# EAGLE board UwU Bot (EAGLE 9.6.2)
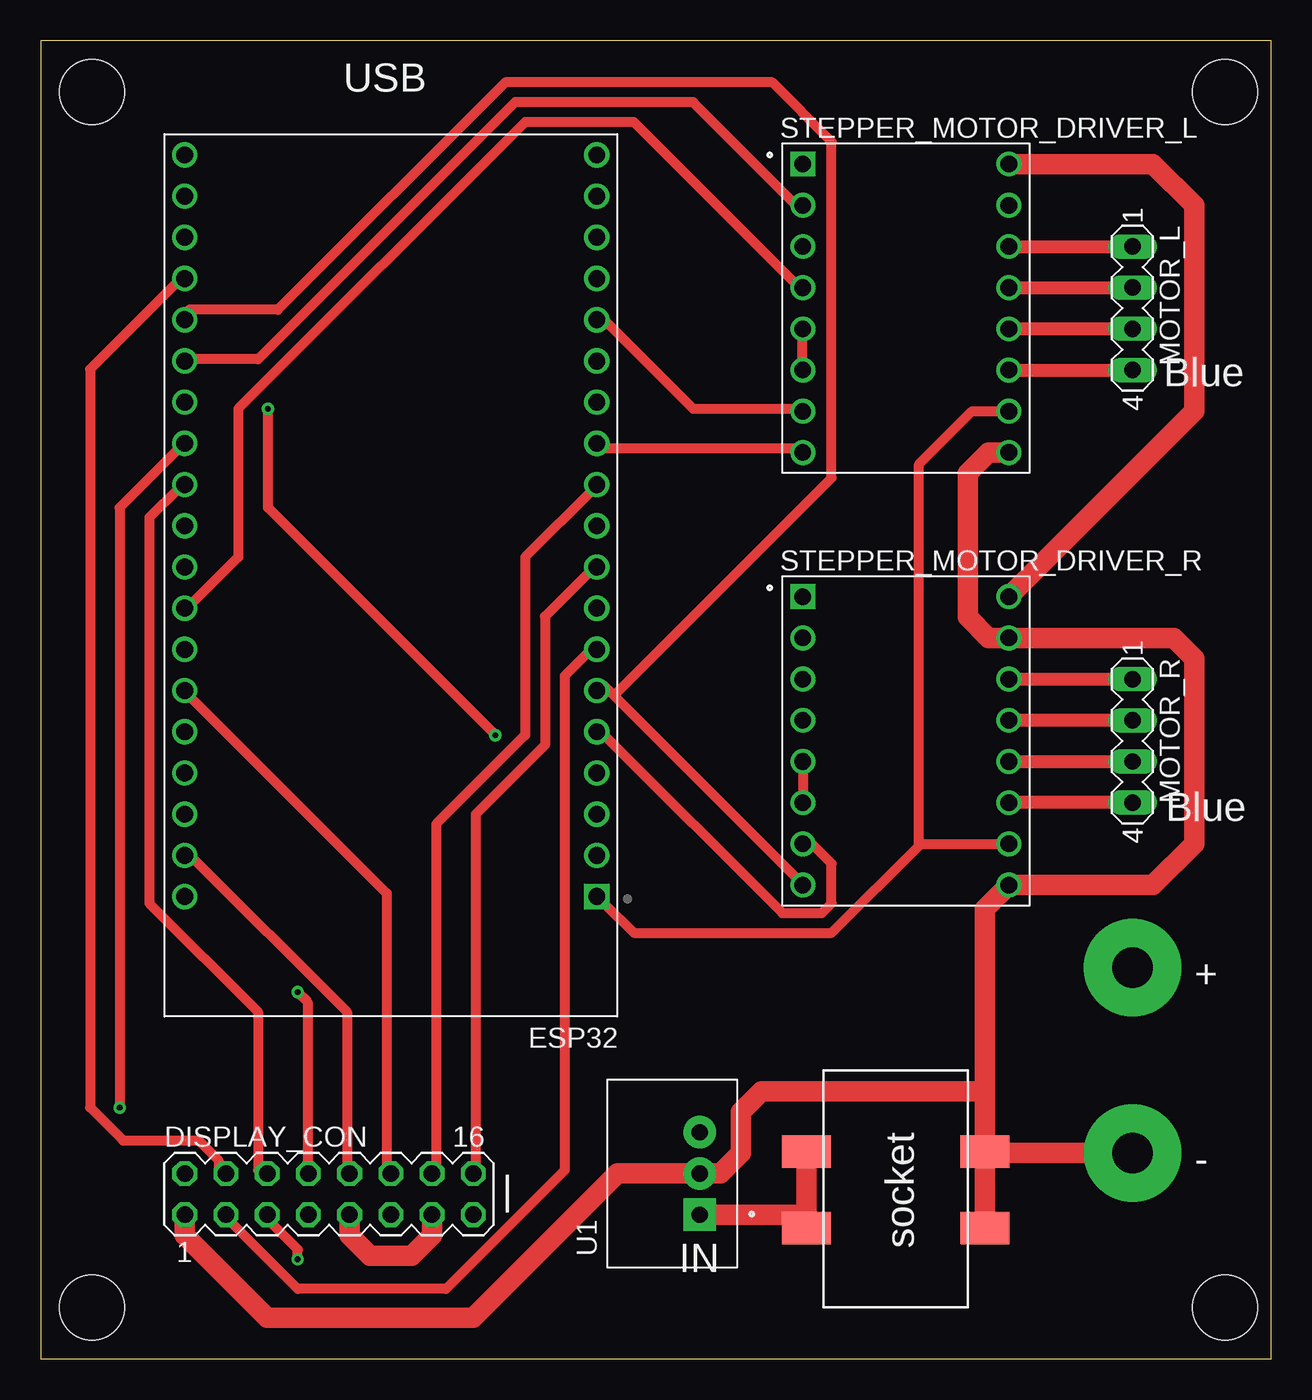
[diagram p0: board, top side]
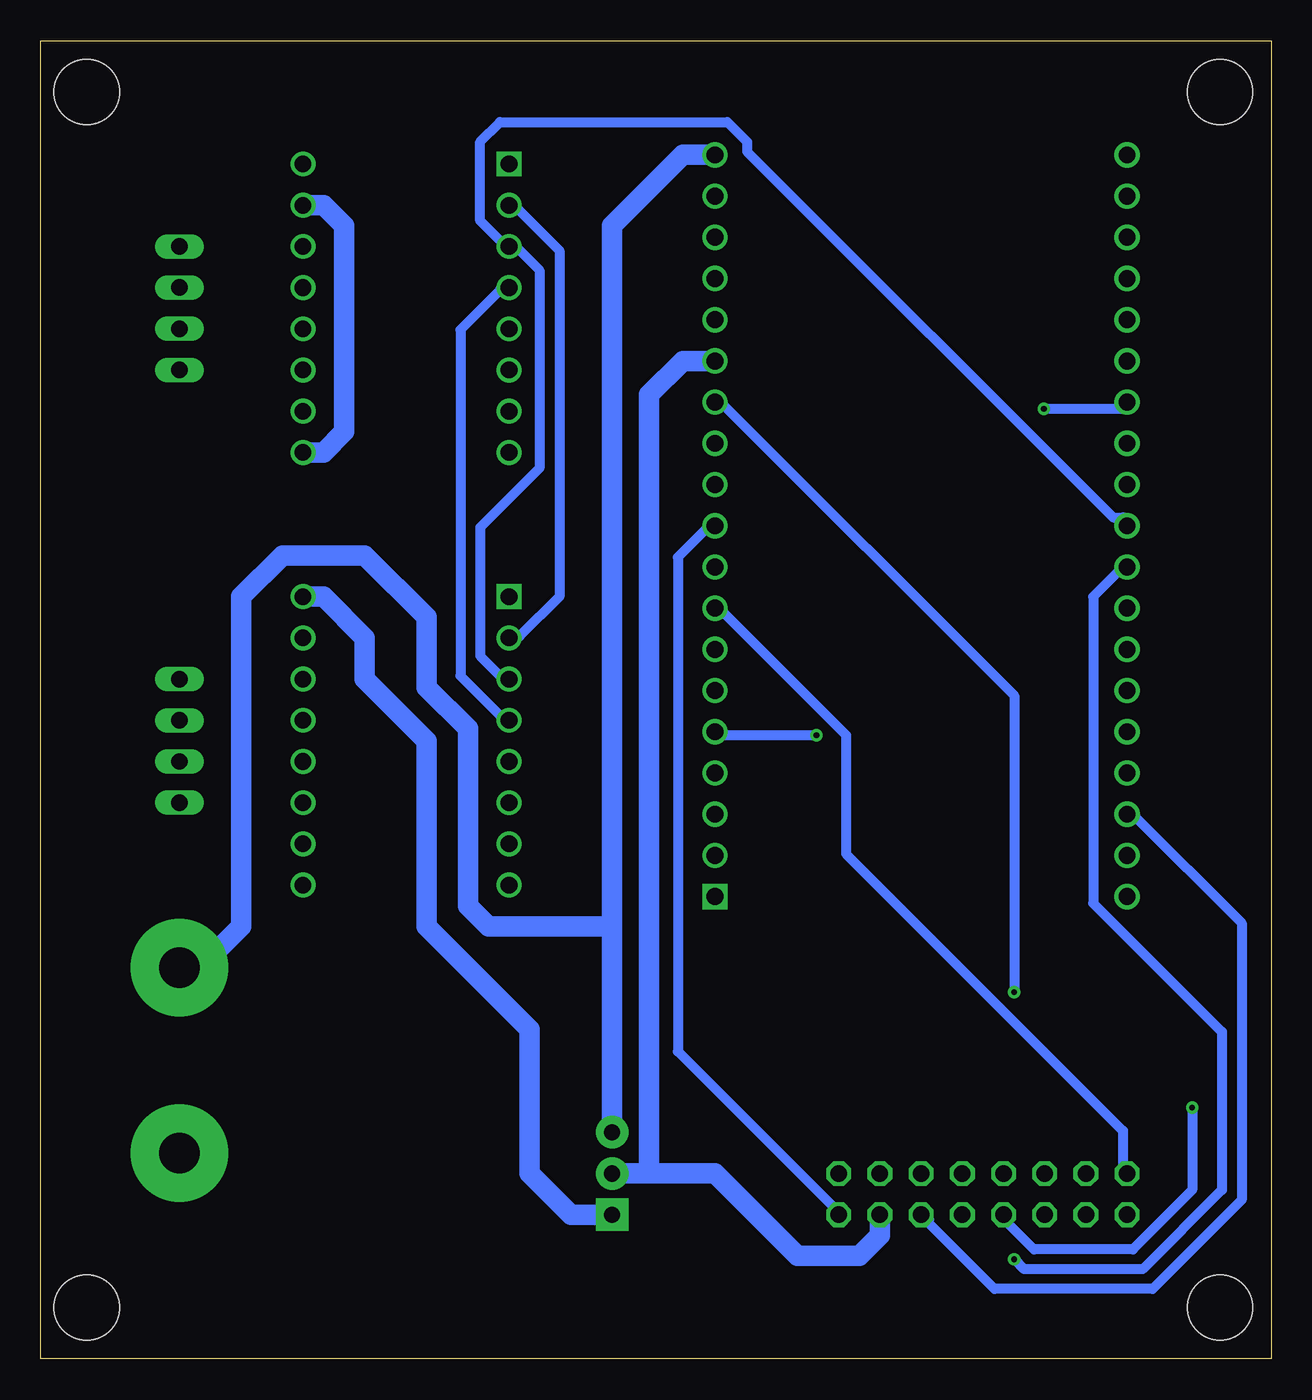
[diagram p1: board, bottom side, seen from below]

Size 75.87 x 81.27 mm. Coordinates in mm from the lower left corner, seen from the top.
Outline: 0,0 75.87,0 75.87,81.27 0,81.27 0,0
Copper layers (1*16): Top 0.035mm / dielectric 1.5mm / Bottom 0.035mm
Design rules "default *": minimum track width 24mil, minimum drill 0.35mm, track to track 24mil, track to pad 24mil, pad to pad 24mil, via to via 24mil, smd to smd 24mil, copper to edge 40mil, drill to drill 6mil, minimum pad ring 10mil, minimum via ring 8mil, stop-mask expansion 4mil, vias tented up to drill 0mil, thermal gap 10mil
Holes 4 mm at 3.17,78.11 73.03,78.11 73.03,3.17 3.17,3.17

## Footprints (pad centres in the part's own frame; a part is rotated, then mirrored left to right if it is on the bottom)
MA08-2 = drill 1.016 octagon: 1 -8.89,-1.27; 2 -8.89,1.27; 3 -6.35,-1.27; 4 -6.35,1.27; 5 -3.81,-1.27; 6 -3.81,1.27; 7 -1.27,-1.27; 8 -1.27,1.27; 9 1.27,-1.27; 10 1.27,1.27; 11 3.81,-1.27; 12 3.81,1.27; 13 6.35,-1.27; 14 6.35,1.27; 15 8.89,-1.27; 16 8.89,1.27
MODULE_ESP32-DEVKITC-32D = drill 1.04 square: 1 -12.7,19.76 | drill 1.04: 2 -12.7,17.22; 3 -12.7,14.68; 4 -12.7,12.14; 5 -12.7,9.6; 6 -12.7,7.06; 7 -12.7,4.52; 8 -12.7,1.98; 9 -12.7,-0.56; 10 -12.7,-3.1; 11 -12.7,-5.64; 12 -12.7,-8.18; 13 -12.7,-10.72; 14 -12.7,-13.26; 15 -12.7,-15.8; 16 -12.7,-18.34; 17 -12.7,-20.88; 18 -12.7,-23.42; 19 -12.7,-25.96; 20 12.7,19.76; 21 12.7,17.22; 22 12.7,14.68; 23 12.7,12.14; 24 12.7,9.6; 25 12.7,7.06; 26 12.7,4.52; 27 12.7,1.98; 28 12.7,-0.56; 29 12.7,-3.1; 30 12.7,-5.64; 31 12.7,-8.18; 32 12.7,-10.72; 33 12.7,-13.26; 34 12.7,-15.8; 35 12.7,-18.34; 36 12.7,-20.88; 37 12.7,-23.42; 38 12.7,-25.96
MA04-1 = drill 1.016 long: 1 -3.81,0; 2 -1.27,0; 3 1.27,0; 4 3.81,0
MODULE_A4988_STEPPER_MOTOR_DRIVER_CARRIER_BLACK = drill 1.02 square: 1 -6.35,8.89 | drill 1.02: 2 -6.35,6.35; 3 -6.35,3.81; 4 -6.35,1.27; 5 -6.35,-1.27; 6 -6.35,-3.81; 7 -6.35,-6.35; 8 -6.35,-8.89; 9 6.35,-8.89; 10 6.35,-6.35; 11 6.35,-3.81; 12 6.35,-1.27; 13 6.35,1.27; 14 6.35,3.81; 15 6.35,6.35; 16 6.35,8.89
173010535 = drill 1 pad 2 square: 1 -2.54,0 | drill 1 pad 2: 2 0,0; 3 2.54,0
BUCHSE = smd 2 x 3: P$1 5,9.95; P$2 9.7,9.95; P$3 5,-1.05; P$4 9.7,-1.05

## Placement (x,y rotation side)
DISPLAY_CON  [MA08-2]  17.78,10.16 0 top
ESP32  ESP32-DEVKITC-32D  [MODULE_ESP32-DEVKITC-32D]  21.59,48.26 180 top
MOTOR_L  [MA04-1]  67.31,64.77 270 top
MOTOR_R  [MA04-1]  67.31,38.1 270 top
STEPPER_MOTOR_DRIVER_L  A4988_STEPPER_MOTOR_DRIVER  [MODULE_A4988_STEPPER_MOTOR_DRIVER_CARRIER_BLACK]  53.34,64.77 0 top
STEPPER_MOTOR_DRIVER_R  A4988_STEPPER_MOTOR_DRIVER  [MODULE_A4988_STEPPER_MOTOR_DRIVER_CARRIER_BLACK]  53.34,38.1 0 top
U1  173010535  [173010535]  40.64,11.43 90 top
U$1  BUCHSEDC  [BUCHSE]  48.26,17.78 270 top

## Library data of the parts
DISPLAY_CON MOTOR_L MOTOR_R = con-lstb; OC_FARNELL: unknown; OC_NEWARK: unknown
ESP32 = ESP32-DEVKITC-32D; AVAILABILITY: In Stock; DESCRIPTION: WiFi Development Tools (802.11) ESP32 General Development Kit, ESP32-WROOM-32D on the board; MF: Espressif Systems; MP: ESP32-DEVKITC-32D; PACKAGE: None; PRICE: None; PURCHASE-URL: https://pricing.snapeda.com/search/part/ESP32-DEVKITC-32D/?ref=eda
STEPPER_MOTOR_DRIVER_L STEPPER_MOTOR_DRIVER_R = A4988_STEPPER_MOTOR_DRIVER_CARRIER_BLACK; AVAILABILITY: Not in stock; DESCRIPTION: Stepper motor controler; IC: A4988; 1.2A; Uin mot: 8÷35V; MF: Pololu; MP: A4988 STEPPER MOTOR DRIVER CARRIER BLACK; PACKAGE: None; PRICE: None
U1 = DC-DC Converter; CREATED_BY: PCBLayout.com; DIGIKEY_PARTNO: 732-173010535-ND; MANUFACTURER: Würth Elektronik; MPN: 173010535
U$1 = buchse

## Nets
1A: MOTOR_R.3 STEPPER_MOTOR_DRIVER_R.12
1A#2: MOTOR_L.3 STEPPER_MOTOR_DRIVER_L.12
3V3: ESP32.1 STEPPER_MOTOR_DRIVER_L.10 STEPPER_MOTOR_DRIVER_R.10
5V: ESP32.19 U1.3
12V: STEPPER_MOTOR_DRIVER_L.16 STEPPER_MOTOR_DRIVER_R.16 U1.1 U$1.P$3 U$1.P$4
DIR_L: ESP32.12 STEPPER_MOTOR_DRIVER_L.8
DIR_R: ESP32.6 ESP32.34 STEPPER_MOTOR_DRIVER_R.8
GND: DISPLAY_CON.1 DISPLAY_CON.9 DISPLAY_CON.13 ESP32.14 STEPPER_MOTOR_DRIVER_L.9 STEPPER_MOTOR_DRIVER_L.15 STEPPER_MOTOR_DRIVER_R.9 STEPPER_MOTOR_DRIVER_R.15 U1.2 U$1.P$1 U$1.P$2
GND2: ESP32.26
GND3: ESP32.20
IO12: DISPLAY_CON.8 ESP32.13
IO15: DISPLAY_CON.4 ESP32.35
IO16: DISPLAY_CON.7 ESP32.31
IO17: DISPLAY_CON.6 ESP32.30
IO18: DISPLAY_CON.5 ESP32.28
IO21: DISPLAY_CON.12 ESP32.25
IO22: DISPLAY_CON.11 ESP32.22
IO23: DISPLAY_CON.10 ESP32.21
IO25: DISPLAY_CON.16 ESP32.9
IO26: DISPLAY_CON.15 ESP32.10
IO27: DISPLAY_CON.14 ESP32.11
IO32: DISPLAY_CON.3 ESP32.7
IO33: DISPLAY_CON.2 ESP32.8
MS1: ESP32.33 STEPPER_MOTOR_DRIVER_L.2 STEPPER_MOTOR_DRIVER_R.2
MS2: ESP32.29 STEPPER_MOTOR_DRIVER_L.3 STEPPER_MOTOR_DRIVER_R.3
MS3: ESP32.27 STEPPER_MOTOR_DRIVER_L.4 STEPPER_MOTOR_DRIVER_R.4
N$1: MOTOR_R.4 STEPPER_MOTOR_DRIVER_R.11
N$2: STEPPER_MOTOR_DRIVER_R.5 STEPPER_MOTOR_DRIVER_R.6
N$3: STEPPER_MOTOR_DRIVER_L.5 STEPPER_MOTOR_DRIVER_L.6
N$4: MOTOR_L.4 STEPPER_MOTOR_DRIVER_L.11
N$26: MOTOR_L.2 STEPPER_MOTOR_DRIVER_L.13
N$27: MOTOR_L.1 STEPPER_MOTOR_DRIVER_L.14
N$28: MOTOR_R.1 STEPPER_MOTOR_DRIVER_R.14
N$29: MOTOR_R.2 STEPPER_MOTOR_DRIVER_R.13
STEP_L: ESP32.15 STEPPER_MOTOR_DRIVER_L.7
STEP_R: ESP32.5 ESP32.32 STEPPER_MOTOR_DRIVER_R.7

## Tracks (layer width: path | path; a pad name or v marks a point on that pad's centre or on a via)
1A
  Top 0.813: STEPPER_MOTOR_DRIVER_R.12 MOTOR_R.3
1A#2
  Top 0.813: STEPPER_MOTOR_DRIVER_L.12 MOTOR_L.3
3V3
  Top 0.61: 54.25,31.75 54.15,31.75 54.15,55.16 57.41,58.42 STEPPER_MOTOR_DRIVER_L.10 | 54.25,31.75 STEPPER_MOTOR_DRIVER_R.10 | 54.25,31.75 48.77,26.26 36.58,26.26 34.75,28.09 ESP32.1
5V  (via drill 2.5 pad 6)
  Bottom 1.27: U1.3 40.64,26.67 | 40.64,26.67 40.64,69.85 36.27,74.22 ESP32.19 | 40.64,26.67 48.26,26.67 49.53,27.94 49.53,38.86 52.07,41.4 52.07,45.72 55.88,49.53 60.96,49.53 63.5,46.99 63.5,26.67 66.04,24.13 v67.31,24.13
12V
  Top 1.27: U$1.P$3 U$1.P$4 46.4,8.89 U1.1 | STEPPER_MOTOR_DRIVER_R.16 71.12,58.42 71.12,71.12 68.58,73.66 STEPPER_MOTOR_DRIVER_L.16
  Bottom 1.27: U1.1 43.18,8.89 45.72,11.43 45.72,20.32 52.07,26.67 52.07,38.1 55.88,41.91 55.88,44.45 58.42,46.99 STEPPER_MOTOR_DRIVER_R.16
DIR_L
  Top 0.61: STEPPER_MOTOR_DRIVER_L.8 46.94,56.13 34.75,56.13 ESP32.12
DIR_R
  Top 0.61: 35.36,40.89 34.75,41.5 ESP32.6 | 35.36,40.89 46.94,29.31 STEPPER_MOTOR_DRIVER_R.8 | 35.36,40.89 48.77,54.3 48.77,75.03 45.11,78.69 28.65,78.69 14.63,64.67 9.14,64.67 ESP32.34
GND  (via drill 2.5 pad 6)
  Top 0.61: 58.52,8.59 U$1.P$2 | 58.52,12.24 58.3,12.63 U$1.P$1 58.52,12.85 59.13,13.46
  Top 1.016: 58.29,12.7 U$1.P$1
  Top 1.27: v67.31,12.7 58.37,12.7 58.3,12.63 | U$1.P$2 U$1.P$1 58.21,16.51 | 58.21,16.51 58.21,27.73 STEPPER_MOTOR_DRIVER_R.9 68.58,29.21 71.12,31.75 71.12,43.18 69.85,44.45 STEPPER_MOTOR_DRIVER_R.15 58.42,44.45 57.15,45.72 57.15,54.61 58.42,55.88 STEPPER_MOTOR_DRIVER_L.9 | 58.21,16.51 44.45,16.51 43.18,15.24 43.18,12.7 41.91,11.43 U1.2 35.56,11.43 26.67,2.54 13.97,2.54 8.89,7.62 DISPLAY_CON.1 | DISPLAY_CON.13 24.13,7.62 22.86,6.35 20.32,6.35 19.05,7.62 DISPLAY_CON.9
  Bottom 0.61: 40.23,11.63 U1.2
  Bottom 1.27: U1.2 38.35,11.43 | 38.35,11.43 34.29,11.43 29.21,6.35 25.4,6.35 24.13,7.62 DISPLAY_CON.13 | ESP32.14 36.27,61.52 38.35,59.44 38.35,11.43 | STEPPER_MOTOR_DRIVER_L.9 58.42,55.88 57.15,57.15 57.15,69.85 58.42,71.12 STEPPER_MOTOR_DRIVER_L.15
IO12  (via drill 0.35)
  Top 0.61: v15.85,22.61 16.46,22 16.46,11.63 DISPLAY_CON.8
  Bottom 0.61: v15.85,22.61 15.85,40.89 34.14,59.18 ESP32.13
IO15
  Top 0.61: DISPLAY_CON.4 10.97,11.63 10.97,12.24 9.75,13.46 5.08,13.46 3.05,15.49 3.05,61.01 8.53,66.5 ESP32.35
IO16  (via drill 0.35)
  Top 0.61: v4.88,15.49 4.88,52.48 8.53,56.13 ESP32.31
  Bottom 0.61: 16.51,8.76 DISPLAY_CON.7 16.46,8.59 14.63,6.76 8.53,6.76 4.88,10.41 v4.88,15.49
IO17
  Top 0.61: DISPLAY_CON.6 13.41,11.63 13.41,21.39 6.71,28.09 6.71,51.87 8.53,53.7 ESP32.30
IO18  (via drill 0.35)
  Top 0.61: v15.85,6.15 15.85,6.76 14.02,8.59 DISPLAY_CON.5
  Bottom 0.61: v15.85,6.15 15.24,5.54 7.92,5.54 3.05,10.41 3.05,20.17 10.97,28.09 10.97,46.99 9.14,48.82 ESP32.28
IO21
  Top 0.61: DISPLAY_CON.12 21.34,11.63 21.34,28.7 9.14,40.89 ESP32.25
IO22
  Bottom 0.61: 21.08,8.59 DISPLAY_CON.11 21.34,8.59 17.07,4.32 7.32,4.32 1.83,9.8 1.83,26.87 8.53,33.58 ESP32.22
IO23
  Top 0.61: DISPLAY_CON.10 18.9,11.63 18.9,21.39 9.14,31.14 ESP32.21
IO25
  Top 0.61: DISPLAY_CON.16 26.82,11.63 26.82,33.58 31.09,37.85 31.09,45.77 34.14,48.82 ESP32.9
IO26
  Bottom 0.61: DISPLAY_CON.15 26.82,9.2 36.58,18.95 36.58,49.43 34.75,51.26 ESP32.10
IO27
  Top 0.61: DISPLAY_CON.14 24.38,11.63 24.38,32.97 29.87,38.46 29.87,49.43 34.14,53.7 ESP32.11
IO32
  Top 0.61: DISPLAY_CON.3 11.58,8.59 15.85,4.32 24.99,4.32 32.31,11.63 32.31,42.11 34.14,43.94 ESP32.7
IO33
  Bottom 0.61: DISPLAY_CON.2 9.14,11.63 9.14,14.07 26.21,31.14 26.21,38.46 34.14,46.38 ESP32.8
MS1
  Top 0.61: ESP32.33 9.14,61.62 13.41,61.62 29.26,77.47 40.23,77.47 46.94,70.76 STEPPER_MOTOR_DRIVER_L.2
  Bottom 0.61: STEPPER_MOTOR_DRIVER_R.2 46.94,44.55 46.33,44.55 43.89,46.99 43.89,68.33 46.94,71.37 STEPPER_MOTOR_DRIVER_L.2
MS2
  Bottom 0.61: STEPPER_MOTOR_DRIVER_R.3 47.55,42.11 48.77,43.33 48.77,51.26 45.11,54.91 45.11,67.11 46.94,68.94 STEPPER_MOTOR_DRIVER_L.3 47.55,68.94 48.77,70.16 48.77,75.03 47.55,76.25 33.53,76.25 32.31,75.03 32.31,74.42 9.75,51.87 9.14,51.87 ESP32.29
MS3
  Top 0.61: ESP32.27 9.14,46.38 12.19,49.43 12.19,58.57 29.87,76.25 36.58,76.25 46.94,65.89 STEPPER_MOTOR_DRIVER_L.4
  Bottom 0.61: STEPPER_MOTOR_DRIVER_R.4 47.55,39.67 49.99,42.11 49.99,63.45 47.55,65.89 STEPPER_MOTOR_DRIVER_L.4
N$1
  Top 0.813: MOTOR_R.4 STEPPER_MOTOR_DRIVER_R.11
N$2
  Top 0.61: STEPPER_MOTOR_DRIVER_R.5 STEPPER_MOTOR_DRIVER_R.6
N$3
  Top 0.61: STEPPER_MOTOR_DRIVER_L.6 46.94,61.01 46.94,63.45 STEPPER_MOTOR_DRIVER_L.5
N$4
  Top 0.813: STEPPER_MOTOR_DRIVER_L.11 MOTOR_L.4
N$26
  Top 0.813: STEPPER_MOTOR_DRIVER_L.13 MOTOR_L.2
N$27
  Top 0.813: STEPPER_MOTOR_DRIVER_L.14 MOTOR_L.1
N$28
  Top 0.813: STEPPER_MOTOR_DRIVER_R.14 MOTOR_R.1
N$29
  Top 0.813: MOTOR_R.2 STEPPER_MOTOR_DRIVER_R.13
STEP_L
  Top 0.61: STEPPER_MOTOR_DRIVER_L.7 46.94,58.57 40.23,58.57 34.75,64.06 ESP32.15
STEP_R  (via drill 0.35)
  Top 0.61: STEPPER_MOTOR_DRIVER_R.7 47.55,31.75 48.77,30.53 48.77,28.09 48.16,27.48 45.72,27.48 34.75,38.46 ESP32.5 | v14.02,58.57 14.02,52.48 v28.04,38.46
  Bottom 0.61: v14.02,58.57 9.14,58.57 ESP32.32 | v28.04,38.46 34.14,38.46 ESP32.5

## Text on the board
tNames: USB | Blue | Blue | + | - | | | IN